# Altium PCB PCB1.PcbDoc
Units mm, origin at the board's own origin, x right, y up, seen from the top; angles counter-clockwise.
Board outline 125.75 x 36.04 mm, 2 copper layers (Top Layer, Bottom Layer); 29 components, 16 nets, 85 pads, 0 vias.
Unrouted connection lines stored in the file: 21.
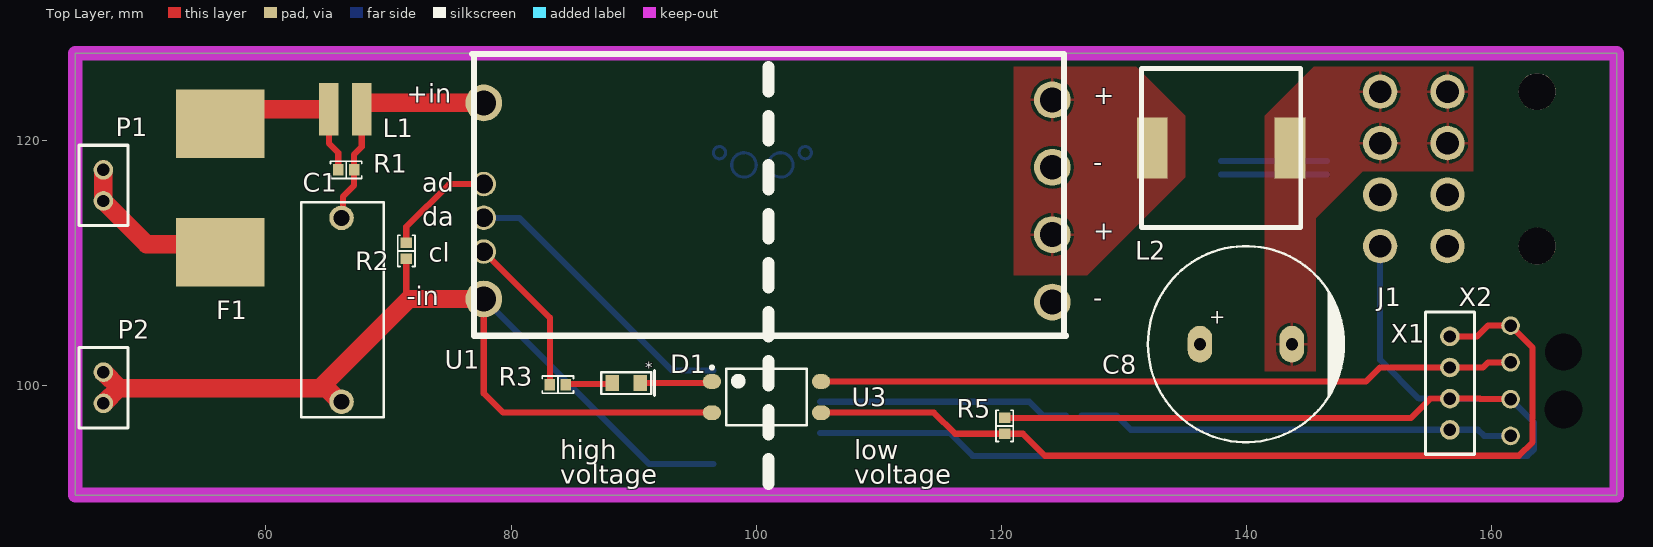
[diagram p0: Top Layer view]
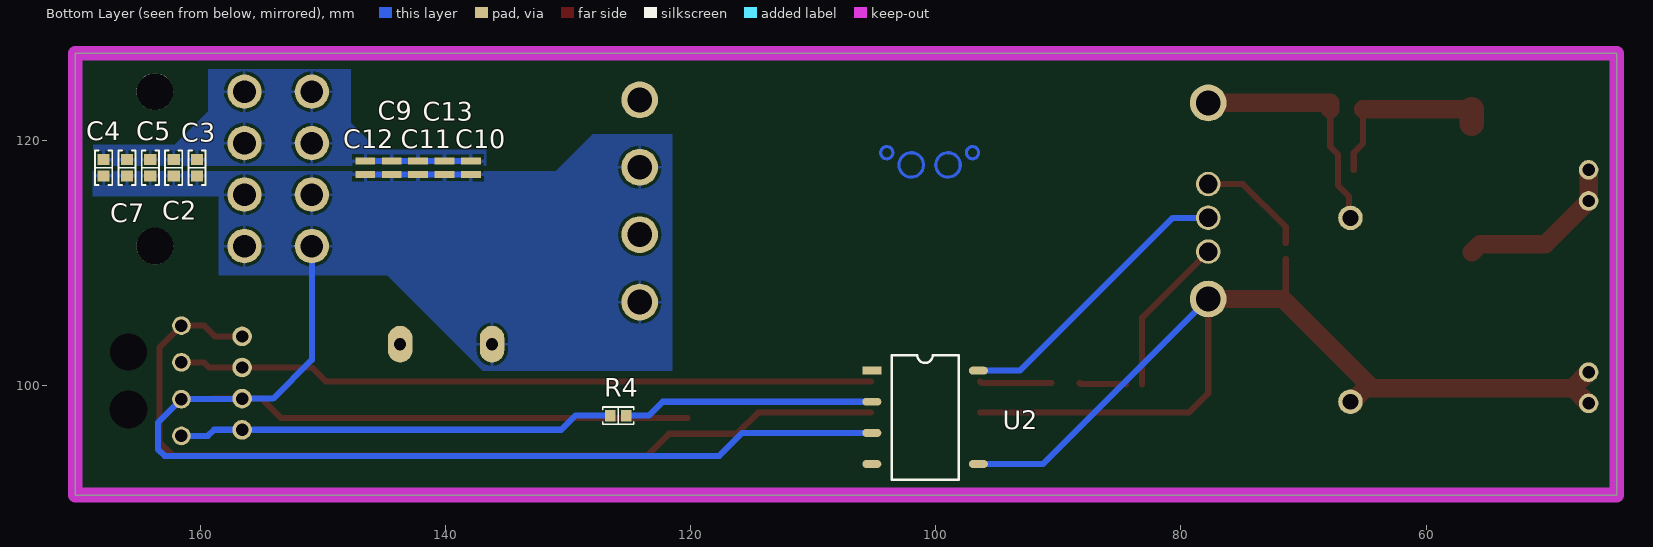
[diagram p1: Bottom Layer view, seen from below]
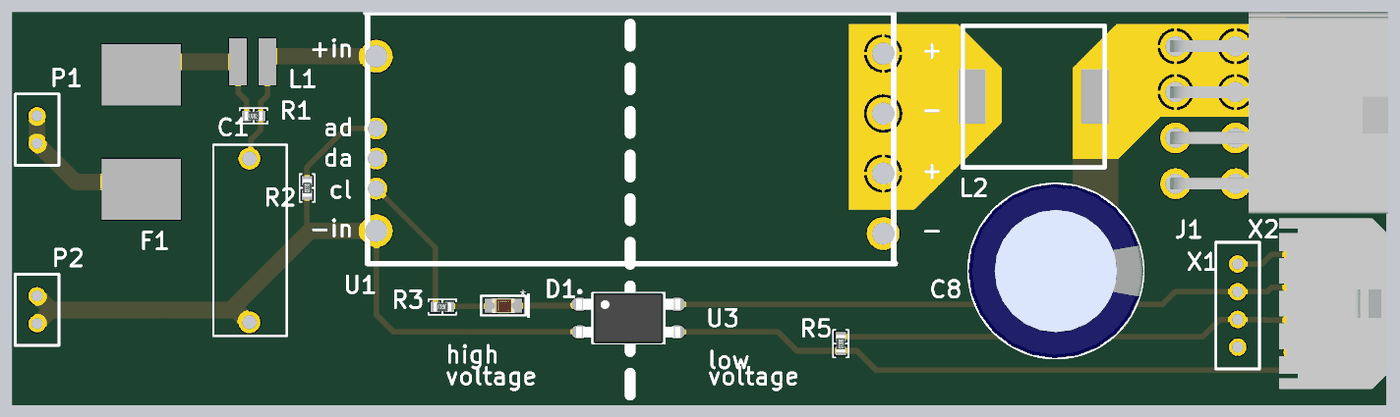
[diagram p2: 3D render of the assembled board from above, using the file's embedded part models]
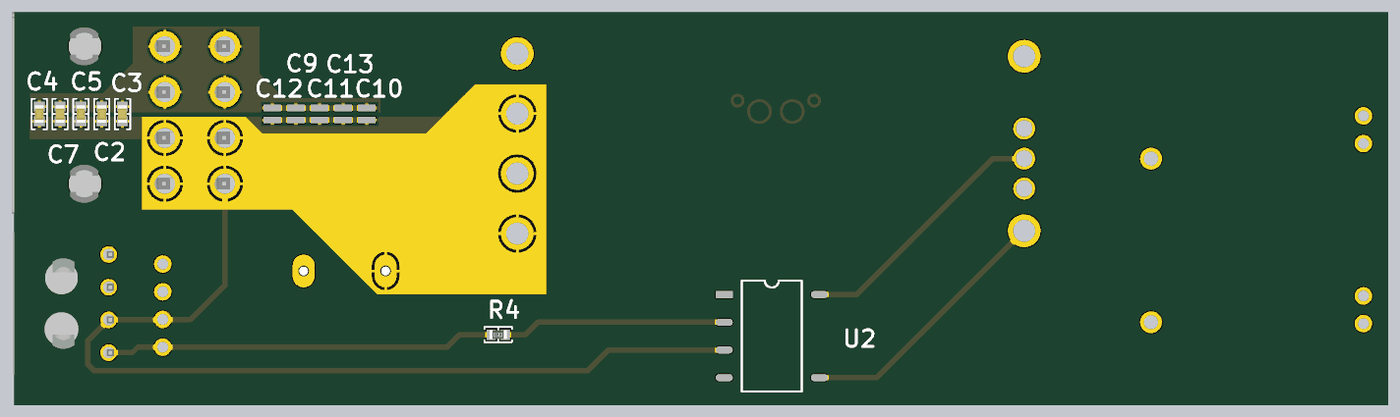
[diagram p3: 3D render of the assembled board from below, using the file's embedded part models]

## Layer stack, top to bottom
Top Solder: solder mask 0.0102, Solder Resist, Dk 3.5
Top Layer: signal copper 0.0356
Dielectric 1: dielectric 0.32, FR-4, Dk 4.8
Bottom Layer: signal copper 0.0356
Bottom Solder: solder mask 0.0102, Solder Resist, Dk 3.5

## Board outline
44.452,91.065 170.199,91.065 170.199,127.104 44.452,127.104

## Design rules (kind name [scope] priority, off if disabled: settings)
Clearance [All] p1: gap=0.254 ignorepadtopadclearanceinfootprint=FALSE except(0: Arc-Hole Track-Hole SMDPad-Hole THPad-Hole Via-Hole Fill-Hole Poly-Hole Region-Hole Text-Hole)
PolygonConnect [All] p1: connectstyle=Relief reliefconductorwidth=0.254 reliefentries=4 polygonreliefangle="90 Angle" airgapwidth=0.254
RoutingVias [All] p1: holewidth=0.711 width=1.27 viastyle="Through Hole" minholewidth=0.711 minwidth=1.27 maxholewidth=0.711 maxwidth=1.27
SolderMaskExpansion [All] p1: expansion=0.102
Width [All] p1: maxlimit=10 minlimit=0.254 preferedwidth=0.254
30 further rules are at their usual default settings.

## Components (designator, comment, footprint, x,y, rotation, side; value= is the part's Value field where it differs from the comment)
C1 "HV Cap" ECW-FD2W684K-TH-CAP 66.167,113.679 r270 top value=.68uf
C2 "capacitor" 0603 162.179,117.769 r90 bottom
C3 "capacitor" 0603 160.274,117.769 r90 bottom
C4 "capacitor" 0603 167.894,117.769 r90 bottom
C5 "capacitor" 0603 164.084,117.769 r90 bottom
C7 "capacitor" 0603 165.989,117.769 r90 bottom
C8 "capacitor" "CAP AL TH D16 L7.5 H16.5" 139.954,103.378 r0 top
C9 "capacitor" 0508 144.399,117.771 r90 bottom
C10 "capacitor" 0508 137.922,117.771 r90 bottom
C11 "capacitor" 0508 142.24,117.771 r90 bottom
C12 "capacitor" 0508 146.558,117.771 r90 bottom
C13 "capacitor" 0508 140.081,117.771 r90 bottom
D1 "LED" 0805_LED 89.408,100.203 r0 top value=Red
F1 "Fuse" 0885004.DR 56.261,121.371 r270 top
J1 "8 PinConnector" 39-30-0080 156.403,117.679 r90 top
L1 "SRR3818A-1R0Y" SRR3818A-1R0Y 65.118,122.555 r0 top value=1uH
L2 "744309033" 744309033 137.922,119.38 r0 top value=330nH
P1 "M20-9990246" M20-9990246 46.736,117.602 r90 top value=CONN
P2 "M20-9990246" M20-9990246 46.736,101.092 r90 top value=CONN
R1 "Resistor 1.0 0603 1/10W 1%" "RES 0603/1608" 66.548,117.602 r0 top value=1.0
R2 "Resistor 13k 0603 1/10W 1%" "RES 0603/1608" 71.45,110.991 r270 top value=13k
R3 "Resistor 330 0603 1/10W 1%" "RES 0603/1608" 83.82,100.076 r180 top value=1k
R4 "Resistor 3.0k 0603 1/10W 1%" "RES 0603/1608" 125.905,97.544 r180 bottom value=15k
R5 "10K" "RES 0603/1608" 120.272,96.715 r270 top
U1 "DCM290P138T600A40" DCM290P138T600A40 100.965,115.062 r0 top value=Null
U2 "PLB171" PLB171P 105.22,101.219 r180 bottom
U3 "CPC1393" CPC1393GR 100.838,99.06 r0 top value=Null
X1 "4 pin header" 4pinheader 156.591,104.013 r90 top
X2 "*" Molex_43650_0402 161.542,95.893 r0 top

## Footprints (in the part's own frame and the unit in brackets; to place one, negate y for a bottom-side part, rotate by r counter-clockwise, add the part's x,y. Pads: shape width x height; smd on the part's side, far side on the other; paste and mask are expansions set on the pad)
4pinheader [mm]
  round 1.6 hole 1: 1(-7.62,0) 2(-5.08,0) 3(-2.54,0) 4(0,0)
  silkscreen extent -9.62,-2 2,2
39-30-0080 [mm]
  round 2.8 hole 1.85: 1(6.3,0) 2(2.1,0) 5(6.3,5.5) 6(2.1,5.5)
  round 2.8 / inner round 1.524 / far side round 2.8 hole 1.85: 3(-2.1,0) 4(-6.3,0) 7(-2.1,5.5) 8(-6.3,5.5)
  round 3 hole 3 unplated: MH1(-6.3,-7.3) MH2(6.3,-7.3)
  body extent -9,-13.97 9.4,5.97, height 11.4
0508 [mm]
  rect 0.6x1.6 smd: 1(-0.55,0) 2(0.55,0)
0603 [mm]
  rect 0.9x1 smd: 1(-0.675,0) 2(0.675,0)
  silkscreen extent -1.4,-0.7 1.4,0.7, body extent -0.8,-0.41 0.8,0.41, height 0.82
0805_LED [mm]
  rect 1.1x1.3 smd: 1(-1.15,0) 2(1.15,0)
  silkscreen extent -2.06,-1.02 2.29,1.02, body extent -1.05,-0.67 1.05,0.68, height 0.9
0885004.DR [mm] "4A 450VDC nonreset SMD fuse"
  rect 5.6x7.23 smd: 1(0,0) 2(10.5,0)
744309033 [mm] "330nH ww inductor"
  rect 2.5x5 smd: 1(-5.625,0) 2(5.625,0)
  silkscreen extent -6.5,-6.5 6.5,6.5
"CAP AL TH D16 L7.5 H16.5" [mm] "16MM Diameter, 7.5MM Lead Spacing Aluminium Capacitor"
  oval 2x3 hole 1: 1(-3.75,0) 2(3.75,0)
  silkscreen extent -8,-8 8,8, body extent -8,-7.99 8,7.99, height 16.7
CPC1393GR [mm] "CPC1393GR, 4-Leads, Body 4.57x6.35mm, Pitch 2.54mm, IPC Medium Density"
  oval 1.5x1.2 smd: 1(-4.45,1.27) 2(-4.45,-1.27) 3(4.45,-1.27) 4(4.45,1.27)
  silkscreen extent -4.57,-2.3 3.3,2.54, body extent -4.76,-2.3 4.76,2.3, height 3.3
DCM290P138T600A40 [mm] "Vicor DC/DC converter"
  round 3 hole 2.03: 1(-23.19,8) 5(-23.19,-8) 6(23.19,8.25) 7(23.19,2.75) 8(23.19,-2.75) 9(23.19,-8.25)
  round 2 hole 1.52: 2(-23.19,1.38) 3(-23.19,-1.38) 4(-23.19,-4.13)
  silkscreen extent -24.15,-11 24.3,12, body extent -24,-11 24,12, height 7.3
ECW-FD2W684K-TH-CAP [mm]
  round 2 hole 1.3: 1(0,0) 2(15,0)
  silkscreen extent -1.27,-3.3 16.26,3.43, body extent -1.35,-3.3 16.35,3.45, height 10
M20-9990246 [mm]
  round 1.6 hole 1: 1(-2.54,0) 2(0,0)
  silkscreen extent -4.54,-2 2,2
Molex_43650_0402 [mm]
  round 1.524 hole 1.02: 1(0,0) 2(0,3) 3(0,6) 4(0,9)
  round 0 hole 3.1 unplated: 5(4.32,2.15)
  round 0 hole 3 unplated: 5(4.32,6.85)
  body extent -1.15,-3.32 8.75,12.33, height 5.57
PLB171P [mm]
  rect 1.55x0.65 smd: 1(0,0)
  oval 1.55x0.65 smd: 2(0,-2.54) 3(0,-5.08) 4(0,-7.62) 5(8.7,-7.62) 8(8.7,0)
  silkscreen extent 1.61,-8.89 7.09,1.27
"RES 0603/1608" [mm] "Chip Resistor, 2-Leads, Body 1.60x0.80mm, IPC Medium Density"
  rect 0.85x0.95 smd: 1(-0.65,0) 2(0.65,0)
  silkscreen extent -1.27,-0.7 1.27,0.7, body extent -0.8,-0.4 0.8,0.4, height 0.45
SRR3818A-1R0Y [mm] "1uH fixed inductor"
  rect 1.6x4.3 smd: 1(0,0) 2(2.7,0)

## Part data
C1: library part 1082, Dielectric=Polypropylene, Manufacturer_id=1, mfrpartno=ECW-FD2W684K, package=TH, Tolerance=10%, Voltage_Rating=450V, ComponentLink1Description=Datasheet, Created_By="Angel Delgado", Drawer_id=1, idCapacitor=1082, link=https://www.mouser.com/ProductDetail/Panasonic/ECW-FD2W684K?qs=sGAEpiMZZMsh%252b1woXyUXj8Oz95SkSMnKDNbVTfkAU30%3d, name="Cap_.68uf_450V_CAP TH"
C2: library part 1, "Generic 0603 capacitor", capacitance=0.47uF, Dielectric=Ceramic, package=0603, percent tolerance=10, voltage=50, ESR=1, id=1, name="0603 Capacitor", quantity=0
C3: library part 1, "Generic 0603 capacitor", capacitance=47uF, Dielectric=Ceramic, package=0603, percent tolerance=10, voltage=50, ESR=1, id=1, name="0603 Capacitor", quantity=0
C4 C5: library part 1, "Generic 0603 capacitor", capacitance=4.7uF, Dielectric=Ceramic, package=0603, percent tolerance=10, voltage=50, ESR=1, id=1, name="0603 Capacitor", quantity=0
C7: library part 1, "Generic 0603 capacitor", capacitance=47pF, Dielectric=Ceramic, package=0603, percent tolerance=10, voltage=50, ESR=1, id=1, name="0603 Capacitor", quantity=0
C8: library part 8, "Generic D16 L7.5 H16.5 capacitor", capacitance=4700uF, Dielectric=Ceramic, package="CAP AL TH D16 L7.5 H16.5", percent tolerance=0, createdby="Eric Tse", createddate="11/22/2019 10:59:57 PM", ESR=0, id=8, name="CAP AL TH D16 L7.5 H16.5", quantity=0, updatedby="Eric Tse", updateddate="11/22/2019 10:59:57 PM", voltage=0
C9: library part 7, "generic 0508 capacitor", capacitance=4.7pF, Dielectric=Ceramic, package=0508, percent tolerance=0, createdby="Eric Tse", createddate="11/22/2019 10:07:42 PM", ESR=0, id=7, link=https://www.digikey.com/product-detail/en/murata-electronics/LLL216R71E104MA01L/490-4346-2-ND/1022298, name="0508 Capacitor", quantity=0, updatedby="Eric Tse", updateddate="11/22/2019 10:07:42 PM", voltage=0
C10: library part 7, "generic 0508 capacitor", capacitance=47nF, Dielectric=Ceramic, package=0508, percent tolerance=0, createdby="Eric Tse", createddate="11/22/2019 10:07:42 PM", ESR=0, id=7, link=https://www.digikey.com/product-detail/en/murata-electronics/LLL216R71E104MA01L/490-4346-2-ND/1022298, name="0508 Capacitor", quantity=0, updatedby="Eric Tse", updateddate="11/22/2019 10:07:42 PM", voltage=0
C11: library part 7, "generic 0508 capacitor", capacitance=4.7nF, Dielectric=Ceramic, package=0508, percent tolerance=0, createdby="Eric Tse", createddate="11/22/2019 10:07:42 PM", ESR=0, id=7, link=https://www.digikey.com/product-detail/en/murata-electronics/LLL216R71E104MA01L/490-4346-2-ND/1022298, name="0508 Capacitor", quantity=0, updatedby="Eric Tse", updateddate="11/22/2019 10:07:42 PM", voltage=0
C12: library part 7, "generic 0508 capacitor", capacitance=47uF, Dielectric=Ceramic, package=0508, percent tolerance=0, createdby="Eric Tse", createddate="11/22/2019 10:07:42 PM", ESR=0, id=7, link=https://www.digikey.com/product-detail/en/murata-electronics/LLL216R71E104MA01L/490-4346-2-ND/1022298, name="0508 Capacitor", quantity=0, updatedby="Eric Tse", updateddate="11/22/2019 10:07:42 PM", voltage=0
C13: library part 7, "generic 0508 capacitor", capacitance=0.47uF, Dielectric=Ceramic, package=0508, percent tolerance=0, createdby="Eric Tse", createddate="11/22/2019 10:07:42 PM", ESR=0, id=7, link=https://www.digikey.com/product-detail/en/murata-electronics/LLL216R71E104MA01L/490-4346-2-ND/1022298, name="0508 Capacitor", quantity=0, updatedby="Eric Tse", updateddate="11/22/2019 10:07:42 PM", voltage=0
D1: library part 1, package=0805, Drawer_id=1, idLED=1, Manufacturer_id=1, name=LED_0805_RED, Vf=0.7V
F1: library part 7, id=7, iinterrupt=0, itrip=0, link=https://www.digikey.com/product-detail/en/littelfuse-inc/0885004.DR/F10991CT-ND/8345705, name=0885004.DR, quantity=0, vmax=450
J1: library part 39, "Connector Header Through Hole, Right Angle 8", Manufacturer_Name=Molex, Manufacturer_Part_Number=39-30-0080, package=39-30-0080_1, Allied_Number=70191047, DeviceSetName=39-30-0080, GateName_1=G$1, Height=mm, id=39, LibraryName=39-30-0080, RS_Part_Number=6795852P, RS_Price-Stock=http://uk.rs-online.com/web/p/products/6795852P, SymbolName_1=39-30-0080
L1: library part 4, "1uH fixed inductor", Manufacturer_id=1, package=Nonstandard, Supplier1PartNo=652-SRR3818A-1R0Y, ComponentLink1Description=Mouser, ComponentLink1URL=https://www.mouser.com/ProductDetail/Bourns/SRR3818A-1R0Y?qs=EU6FO9ffTwdCQ1wGwZI3iw%3D%3D, Created_By=Graydon, Created_Date=11/12/2018, Drawer_id=1, idInductor=4, link=https://www.mouser.com/ProductDetail/Bourns/SRR3818A-1R0Y?qs=EU6FO9ffTwdCQ1wGwZI3iw%3D%3D, mfrpartno=SRR3818A-1R0Y, name=SRR3818A-1R0Y, Supplier1=Mouser
L2: library part 3, "330nH wirewound inductor", Manufacturer_id=1, package=Nonstandard, Supplier1PartNo=732-3006-1-ND, Created_By=Graydon, Created_Date=11/12/2018, Drawer_id=1, idInductor=3, link=https://www.digikey.com/product-detail/en/wurth-electronics-inc/744309033/732-3006-1-ND/2626130, mfrpartno=744309033, name=744309033, Supplier1=Digikey
P1 P2: library part 25, "2 Pin VCC Power Header, Male", Manufacturer_id=1, package=Conn, Supplier1PartNo=952-2262-ND, Voltage_Rating=Null, ComponentLink1Description=Null, ComponentLink1URL=https://www.digikey.com/product-detail/en/harwin-inc/M20-9990246/952-2262-ND/3728226, Created_By=Austin, Created_Date=12/15/2018, Drawer_id=1, idConn=25, link=https://www.digikey.com/product-detail/en/harwin-inc/M20-9990246/952-2262-ND/3728226, mfrpartno=M20-9990246, name=M20-9990246, Num_Contacts=2, Num_Rows=Null, Pitch=2.54, Supplier1=Digi-Key, Updated_By=Null
R1: library part 217, Manufacturer_id=1, package=0603, Power=1/10W, Tolerance=1%, ComponentLink1Description=Datasheet, Created_By="Nick Mah", Created_Date=2018-10-20, Drawer_id=1, idResistor=217, name=Res_1.0_0603_1/10W_1%, Supplier 1=Digi-Key
R2: library part 316, Manufacturer_id=1, package=0603, Power=1/10W, Tolerance=1%, ComponentLink1Description=Datasheet, Created_By="Nick Mah", Created_Date=2018-10-20, Drawer_id=1, idResistor=316, name=Res_13k_0603_1/10W_1%, Supplier 1=Digi-Key
R3: library part 277, Manufacturer_id=1, package=0603, Power=1/10W, Tolerance=1%, ComponentLink1Description=Datasheet, Created_By="Nick Mah", Created_Date=2018-10-20, Drawer_id=1, idResistor=277, name=Res_330_0603_1/10W_1%, Supplier 1=Digi-Key
R4: library part 300, Manufacturer_id=1, package=0603, Power=1/10W, Tolerance=1%, ComponentLink1Description=Datasheet, Created_By="Nick Mah", Created_Date=2018-10-20, Drawer_id=1, idResistor=300, name=Res_3.0k_0603_1/10W_1%, Supplier 1=Digi-Key
R5: library part 1, package=0603, percent tolerance=5, id=1, name="0603 Resistor", quantity=0, resistance=10K
U1: library part 24, "Vicor DC/DC converter", Manufacturer_id=1, Supplier1PartNo=1102-5388-ND, Created_By=Graydon, Data_Rate=Null, Drawer_id=1, idIC_Misc=24, link=http://www.vicorpower.com/documents/datasheets/ds_DCM290y138x600A40.pdf, mfrpartno=DCM290P138T600A40, name=DCM290P138T600A40, Num_Circuits=1, Protocol=Null, Supplier1=Digikey, Type=Null, Vin(Max)=Null, Vin(Min)=Null
U2: library part 34, package=PLB171P, id=34, name=PLB171P, quantity=0
U3: library part 26, "Solid State Relay SPST-NO (1 Form A) 4-SMD (0.300\", 7.62mm)", Manufacturer_id=1, mfrpartno=CPC1393GRTR, package=CPC1393GR, Supplier1PartNo=Null, ComponentLink1Description=Null, ComponentLink1URL=Null, Created_By=Lynette, Data_Rate=Null, Drawer_id=1, idIC_Misc=26, link=https://www.digikey.com/product-detail/en/ixys-integrated-circuits-division/CPC1393GRTR/CLA270CT-ND/1277144, name=CPC1393, Num_Circuits=1, Protocol=Null, Supplier1=Null, Type=Null, Updated_By=Null, Vin(Max)=Null, Vin(Min)=Null
X1: library part 40, package=.1in, id=40, name=4pinheader, numcontacts=4, numrows=1, Pitch=.1in, quantity=0
X2: library part 6, "Molex 43650_0402", id=6

## Nets (pads, with @x,y where several pads share a name; then routed paths per layer and width w, separated by ;. In a path a pad name is that pad's centre, name@x,y a point inside that pad or via, vN(x,y) a via of type N, cw(c..) or ccw(c..) an arc to the next point about the centre after c; other vN are vias at no path point)
5V: U3.4 X1.3 X2.3 | length 56.9
  Top Layer w0.5: U3.4 149.735,100.33 150.878,101.473 X1.3 159.286,101.473 159.706,101.893 X2.3
12V_DCDC: C2.2 C3.2 C4.2 C5.2 C7.2 C8.2 C9.2 C10.2 C11.2 C12.2 C13.2 J1.1 J1.2 J1.5 J1.6 L2.2 | length 8.6
  Bottom Layer w0.5: C10.2 C13.2 C11.2 C9.2 C12.2
DCDC_Enable: R4.1 X1.1 X2.1 | length 35.7
  Bottom Layer w0.5: R4.1 129.409,97.544 130.56,96.393 X1.1 158.884,96.393 159.384,95.893 X2.1
DCDC_Fault: R5.2 U3.3 X1.4 X2.4 | length 75.5
  Top Layer w0.5: U3.3 114.497,97.79 116.222,96.065 R5.2 121.751,96.065 123.538,94.277 162.229,94.277 163.343,95.391 163.343,103.092 X2.4 159.696,104.893 158.816,104.013 X1.4
DCDCEnHv: U1.3 U2.8 | length 23.9
  Bottom Layer w0.5: U1.3 80.669,113.682 93.132,101.219 U2.8
GND: C2.1 C3.1 C4.1 C5.1 C7.1 C8.1 C9.1 C10.1 C11.1 C12.1 C13.1 J1.3 J1.4 J1.7 J1.8 R5.1 U1.7 U1.9 U2.3 X1.2 X2.2 | length 136
  Top Layer w0.5: R5.1 153.424,97.365 154.993,98.933 X1.2 159.034,98.933 159.074,98.893 X2.2
  Bottom Layer w0.5: U2.3 115.788,96.139 117.666,94.26 162.918,94.26 163.464,94.807 163.464,96.971 X2.2 161.522,98.913 156.611,98.913 X1.2 154.067,98.933 150.903,102.097 J1.8 ; C10.1 C13.1 C11.1 C9.1 C12.1
HV+MC: F1.2 P1.1 P1.2 | length 13.8
  Top Layer w1.5: P1.2 P1.1 50.255,111.543 55.589,111.543 F1.2
HV_GND: C1.2 P2.1 P2.2 R2.2 U1.5 U2.5 U3.2 | length 93.3
  Top Layer w0.5: R2.2 71.45,107.294 71.682,107.062 ; U1.5 77.775,99.363 79.348,97.79 U3.2
  Top Layer w1.5: P2.1 46.763,98.552 48,99.789 48.066,99.789 ; P2.2 46.763,101.092 48.066,99.789 ; C1.2 66.032,98.679 64.922,99.789 64.409,99.789 ; U1.5 71.682,107.062 64.409,99.789 ; 48.066,99.789 64.409,99.789
  Bottom Layer w0.5: U1.5 77.786,107.073 91.26,93.599 U2.5
NetC1_1: C1.1 L1.2 R1.2 U1.1 | length 20
  Top Layer w0.5: C1.1 66.293,113.805 66.293,115.429 67.198,116.334 R1.2 67.198,118.861 67.818,119.481 L1.2
  Top Layer w1.5: L1.2 67.818,123.062 U1.1
NetD1_1: D1.1 R3.1 | length 3.8
  Top Layer w0.5: R3.1 84.534,100.139 88.194,100.139 D1.1
NetD1_2: D1.2 U3.1 | length 5.9
  Top Layer w0.5: D1.2 96.261,100.203 U3.1
NetF1_1: F1.1 L1.1 R1.1 | length 15.3
  Top Layer w0.5: L1.1 65.14,122.533 65.14,119.751 65.898,118.993 R1.1
  Top Layer w1.5: F1.1@56.261,122.555 L1.1
  Top Layer w2: F1.1 F1.1@56.261,122.555
NetL2_1: L2.1 U1.6 U1.8
NetR2_1: R2.1 U1.2 | length 9.1
  Top Layer w0.5: R2.1 71.45,112.954 74.938,116.442 U1.2
NetR3_2: R3.2 U1.4 | length 13.1
  Top Layer w0.5: U1.4 83.17,105.537 R3.2
NetR4_2: R4.2 U2.2 | length 20.5
  Bottom Layer w0.5: U2.2 122.28,98.679 123.415,97.544 R4.2
pads on no net: J1.MH1 J1.MH2 U2.1 U2.4 X2.5
copper on no net: | length 18.8
  Bottom Layer w0.254: 97.5,119 ccw(c97,119) 97.5,119 ; 100,118 ccw(c99,118) 100,118 ; 103,118 ccw(c102,118) 103,118 ; 104.5,119 ccw(c104,119) 104.5,119

## Polygon pours and split planes (outlines as drawn)
12V_DCDC on Top Layer "Top Layer-12V_DCDC" (solid, pour order 38): 145.652,113.652 145.652,101.184 141.5,101.184 141.5,122 145.5,126 158.5,126 158.5,117.5 149.5,117.5
NetL2_1 on Top Layer "Top Layer-NetL2_1" (solid, pour order 36): 121,126 131,126 135,122 135,117 127,109 121,109
12V_DCDC on Bottom Layer "Bottom Layer-12V_DCDC" (solid, pour order 48): 168.73,117.92 168.73,119.66 162.092,119.66 159.354,122.398 159.354,125.812 147.729,125.812 147.729,121.425 145.542,119.238 136.678,119.238 136.678,117.921 151.348,117.921
GND on Bottom Layer "Bottom Layer-GND" (solid, pour order 46): 158.5,117.5 168.799,117.5 168.799,115.46 158.424,115.46
no net on Bottom Layer "Bottom Layer-No Net" (solid, pour order 44): 170.543,117.727
GND on Bottom Layer "Bottom Layer-GND 1" (solid, pour order 40): 121.5,120.5 128,120.5 131,117.5 149.5,117.5 158.5,117.5 158.5,109 144.734,109 136.958,101.224 121.5,101.224
no net on Top Solder (solid, pour order 52): 145.652,113.652 141.5,113.652 141.5,122 145.5,126 158.5,126 158.5,117.5 149.5,117.5
no net on Top Solder (solid, pour order 50): 121,126 131,126 135,122 135,117 127,109 121,109
no net on Bottom Solder (solid, pour order 54): 149,117.5 147.5,116 146,116 132.5,116 128,120.5 121.5,120.5 121.5,101.224 136.958,101.224 144.734,109 158.5,109 158.5,117.5

## Keep-outs
Keep-Out Layer:
  the board outline again, w1.2

## Silkscreen, mask and mechanical layers (free items; w line width, h text height)
Top Overlay:
  lines w1: 101,92 101,94 ; 101,96 101,98 ; 101,100 101,102 ; 101,104 101,106 ; 101,108 101,110 ; 101,112 101,114 ; 101,116 101,118 ; 101,120 101,122 ; 101,124 101,126
  text "high" at 84,94 h1.54
  text "low" at 108,94 h1.54
  text "voltage" at 84,92 h1.54
  text "voltage" at 108,92 h1.54

## Text inside footprints (layer, text, board x,y; h text height)
C8: Top Overlay "+" at 136.954,104.628 h2
D1: Top Overlay "*" at 90.932,100.711 h1.52
U1: Top Overlay "+" at 127.508,122.936 h1.52; Top Overlay "+" at 127.508,111.887 h1.52; Top Overlay "-" at 127.508,106.426 h1.52; Top Overlay "-" at 127.508,117.475 h1.52; Top Overlay "da" at 72.771,113.03 h1.52; Top Overlay "+in" at 71.501,123.062 h1.52; Top Overlay "ad" at 72.771,115.824 h1.52; Top Overlay "cl" at 73.279,110.109 h1.52; Top Overlay "-in" at 71.501,106.553 h1.52